# EAGLE board Shield_Eth05_p (EAGLE 5.10)
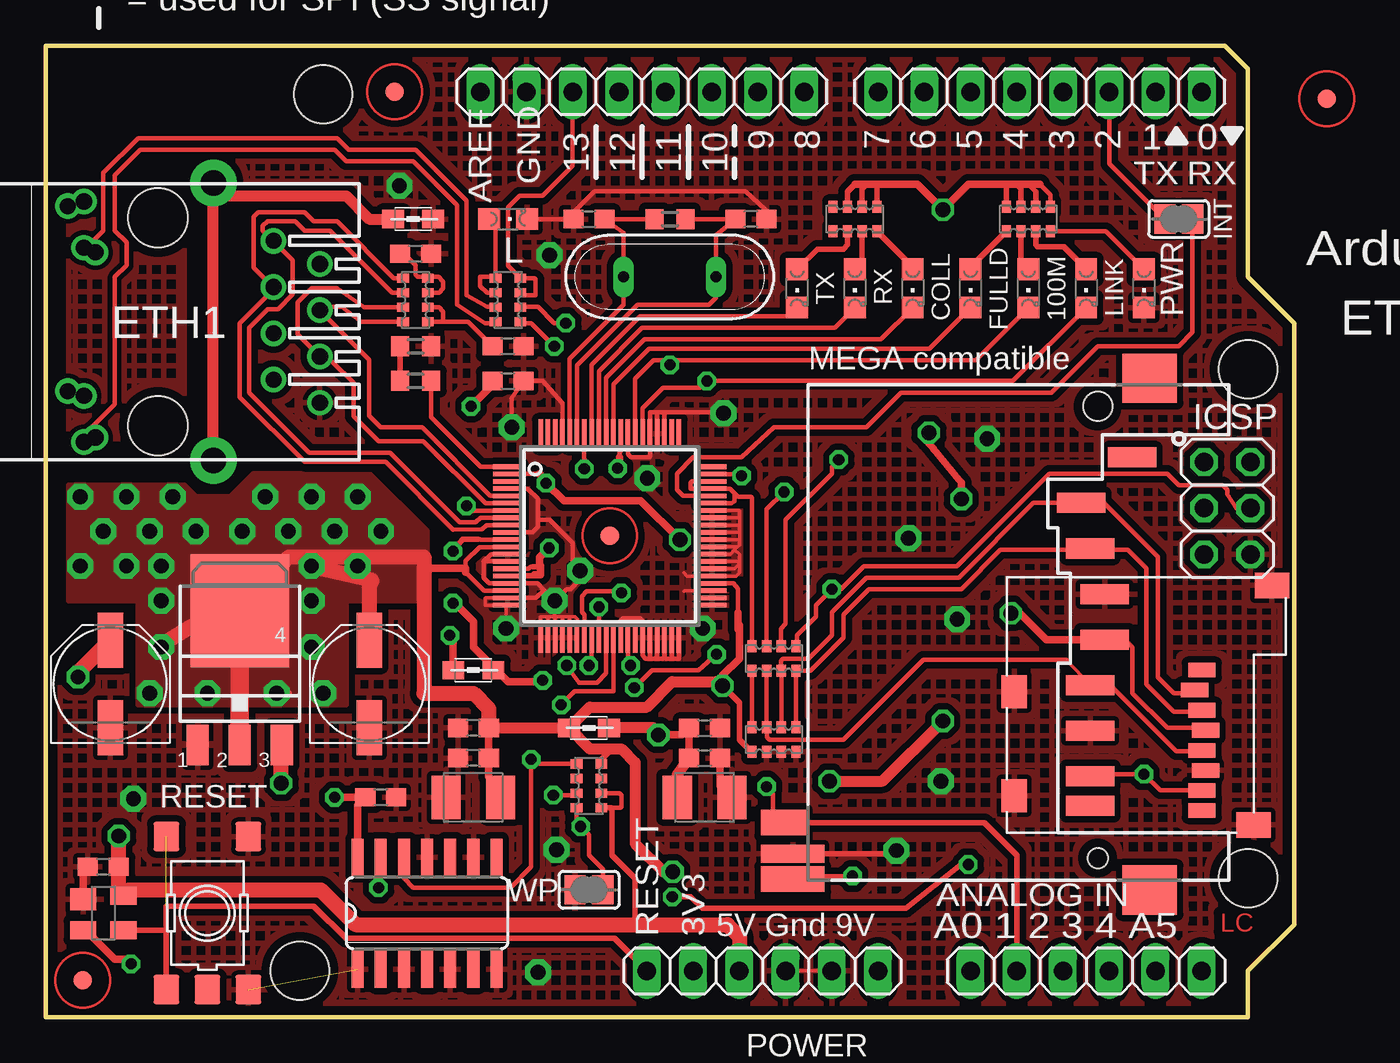
[diagram p0: board, top side]
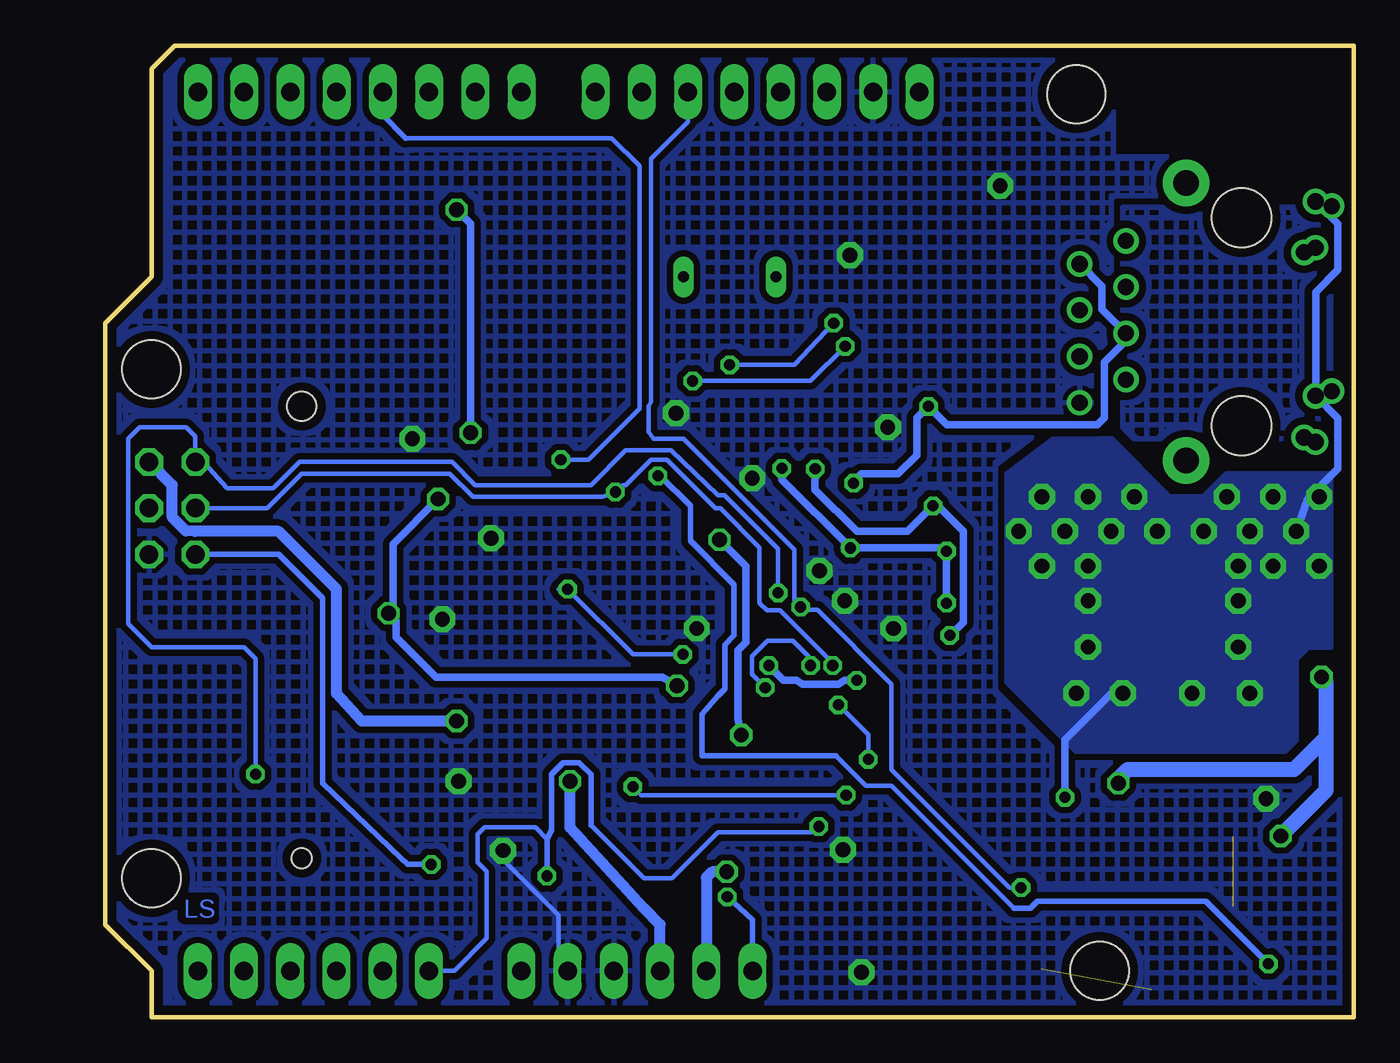
[diagram p1: board, bottom side, seen from below]

Size 68.58 x 53.34 mm. Coordinates in mm from the lower left corner, seen from the top.
Outline: 0,53.34 0,0 66.04,0 66.04,2.54 68.58,5.08 68.58,38.1 66.04,40.64 66.04,52.07 64.77,53.34 0,53.34
Copper layers (1*16): Top 0.035mm / dielectric 1.5mm / Bottom 0.035mm
Design rules "default *": minimum track width 2mil, minimum drill 2mil, track to track 2mil, track to pad 2mil, pad to pad 2mil, via to via 2mil, smd to smd 2mil, copper to edge 20mil, drill to drill 20mil, minimum pad ring 10mil, minimum via ring 8mil, stop-mask expansion 1mil, vias tented up to drill 2mil, thermal gap 10mil
Net classes: 0 default: width 0.152 mm, drill 0.61 mm, clearance 0.152 mm; 1 power: width 0.152 mm, drill 0.61 mm, clearance 0.152 mm; 2 VIN: width 0.61 mm, drill 0.813 mm; 3 usbvcc: width 0.508 mm, drill 0.711 mm, clearance 0.254 mm
Holes 3.2 mm at 66.04,35.56 66.04,7.62 15.24,50.67 13.97,2.54

## Footprints (pad centres in the part's own frame; a part is rotated, then mirrored left to right if it is on the bottom)
CHIPLED_0805 = smd 1.2 x 1.2: A 0,-1.05; C 0,1.05
PANASONIC_D = smd 3 x 1.4: + 2.4,0; - -2.4,0
C0603 = smd 1.1 x 1: 1 -0.85,0; 2 0.85,0
SMC_B = smd 1.6 x 2.4: + -1.5,0; - 1.5,0
SI40138 = drill 0.889 round: 1 -4.445,6.35; 2 -3.175,8.89; 3 -1.905,6.35; 4 -0.635,8.89; 5 0.635,6.35; 6 1.905,8.89; 7 3.175,6.35; 8 4.445,8.89; 9 -6.604,-4.064; 10 -4.064,-4.064; 11 4.064,-4.064; 12 6.604,-4.064; 13 -6.35,-4.953; 14 -3.81,-3.429; 15 3.81,-4.953; 16 6.35,-3.429 | drill 1.4 pad 2.54 round: S1 -7.62,3.048; S2 7.62,3.048 | hole 3.251: -5.715,0; 5.715,0
FIDUCIA-MOUNT = smd 1.016 x 1.016: P$1 0,0
DPACK = smd 1 x 1.6: 1 -2.28,-4.8; 3 2.28,-4.8 | smd 5.4 x 6.2: 2 0,2.5
SOT223 = smd 1.219 x 2.235: 1 -2.311,-3.099; 2 0,-3.099; 3 2.311,-3.099 | smd 3.6 x 2.2: 4 0,3.099
SO14 = smd 0.66 x 2.032: 1 -3.81,-3.073; 2 -2.54,-3.073; 3 -1.27,-3.073; 4 0,-3.073; 5 1.27,-3.073; 6 2.54,-3.073; 7 3.81,-3.073; 8 3.81,3.073; 9 2.54,3.073; 10 1.27,3.073; 11 0,3.073; 12 -1.27,3.073; 13 -2.54,3.073; 14 -3.81,3.073
SQFP-S-10X10-80 = smd 0.25 x 1.6: 1 -3.8,-5.6; 2 -3.4,-5.6; 3 -3,-5.6; 4 -2.6,-5.6; 5 -2.2,-5.6; 6 -1.8,-5.6; 7 -1.4,-5.6; 8 -1,-5.6; 9 -0.6,-5.6; 10 -0.2,-5.6; 11 0.2,-5.6; 12 0.6,-5.6; 13 1,-5.6; 14 1.4,-5.6; 15 1.8,-5.6; 16 2.2,-5.6; 17 2.6,-5.6; 18 3,-5.6; 19 3.4,-5.6; 20 3.8,-5.6; 41 3.8,5.6; 42 3.4,5.6; 43 3,5.6; 44 2.6,5.6; 45 2.2,5.6; 46 1.8,5.6; 47 1.4,5.6; 48 1,5.6; 49 0.6,5.6; 50 0.2,5.6; 51 -0.2,5.6; 52 -0.6,5.6; 53 -1,5.6; 54 -1.4,5.6; 55 -1.8,5.6; 56 -2.2,5.6; 57 -2.6,5.6; 58 -3,5.6; 59 -3.4,5.6; 60 -3.8,5.6 | smd 1.6 x 0.25: 21 5.6,-3.8; 22 5.6,-3.4; 23 5.6,-3; 24 5.6,-2.6; 25 5.6,-2.2; 26 5.6,-1.8; 27 5.6,-1.4; 28 5.6,-1; 29 5.6,-0.6; 30 5.6,-0.2; 31 5.6,0.2; 32 5.6,0.6; 33 5.6,1; 34 5.6,1.4; 35 5.6,1.8; 36 5.6,2.2; 37 5.6,2.6; 38 5.6,3; 39 5.6,3.4; 40 5.6,3.8; 61 -5.6,3.8; 62 -5.6,3.4; 63 -5.6,3; 64 -5.6,2.6; 65 -5.6,2.2; 66 -5.6,1.8; 67 -5.6,1.4; 68 -5.6,1; 69 -5.6,0.6; 70 -5.6,0.2; 71 -5.6,-0.2; 72 -5.6,-0.6; 73 -5.6,-1; 74 -5.6,-1.4; 75 -5.6,-1.8; 76 -5.6,-2.2; 77 -5.6,-2.6; 78 -5.6,-3; 79 -5.6,-3.4; 80 -5.6,-3.8
2X03 = drill 1.016 octagon: 1 -2.54,-1.27; 2 -2.54,1.27; 3 0,-1.27; 4 0,1.27; 5 2.54,-1.27; 6 2.54,1.27
SJ = smd 1.168 x 1.6: 1 -0.762,0; 2 0.762,0
1X08 = drill 1.016 long: 1 -8.89,0; 2 -6.35,0; 3 -3.81,0; 4 -1.27,0; 5 1.27,0; 6 3.81,0; 7 6.35,0; 8 8.89,0
1X06 = drill 1.016 long: 1 -6.35,0; 2 -3.81,0; 3 -1.27,0; 4 1.27,0; 5 3.81,0; 6 6.35,0
0805 = smd 1.2 x 1: 1 -1.1,0; 2 1.1,0
QS = drill 0.61 long: 1 -2.54,0; 2 2.54,0
R0603 = smd 1 x 1.1: 1 -0.85,0; 2 0.85,0
TS42 = smd 1.6 x 1.4: 1 -4.2,2.25; 2 4.2,2.25; 3 -4.2,-2.25; 4 4.2,-2.25; 5 -4.2,0
CAY16 = smd 0.5 x 0.65: 1 -1.2,-0.675; 2 -0.4,-0.675; 3 0.4,-0.675; 4 1.2,-0.675; 5 1.2,0.675; 6 0.4,0.675; 7 -0.4,0.675; 8 -1.2,0.675
SOT143 = smd 1.2 x 1.44: 1 -0.75,-1.1 | smd 1 x 1.44: 2 0.95,-1.1; 3 0.95,1.1; 4 -0.95,1.1
FPS009-3000 = smd 2.65 x 1.1: 1 -0.915,-5.3; 2 -0.415,-7.8; 3 0.385,-10.3; 4 0.385,-12.8; 5 -0.415,-15.3; 6 -0.415,-17.8; 7 -0.415,-20.3; 8 -0.415,-21.925; 9 1.885,-2.8 | smd 3.5 x 1: COM_TERM -16.75,-24.55 | smd 2.5 x 1.4: DETECT -17.25,-22.85 | smd 3 x 2.7: M1 2.85,1.55; M2 2.85,-26.55 | smd 3.5 x 1.4: WRITE_PROT -16.75,-25.95 | hole 1.6: 0,0 | hole 1.1: 0,-24.8
SDCARD-15TW-8821 = smd 0.8 x 1.5: 1 0,0; 2 1.1,-0.4; 3 2.2,0; 4 3.3,0.2; 5 4.4,0; 6 5.5,0.2; 7 6.6,0; 8 7.7,0 | smd 1.4 x 1.9: GND1 -4.66,3.85; GND2 8.49,2.85 | smd 1.8 x 1.4: GND3 1.19,-10.3; GND4 6.89,-10.3

## Placement (x,y rotation side)
100M  Yellow  [CHIPLED_0805]  53.98,40.01 180 top
C1  100u  [PANASONIC_D]  17.78,18.29 90 top
C2  100n  [C0603]  18.41,12.06 180 top
C3  100u  [PANASONIC_D]  3.56,18.29 90 top
C4  100n  [C0603]  25.4,34.92 0 top
C5  100n  [C0603]  20.32,41.91 180 top
C6  100n  [C0603]  3.17,8.26 180 top
C7  100n  [C0603]  25.4,36.83 180 top
C13  22p  [C0603]  38.73,43.81 180 top
C14  22p  [C0603]  29.84,43.81 0 top
C15  100n  [C0603]  36.2,14.22 0 top
C16  100n  [C0603]  36.2,15.88 0 top
C17  100n  [C0603]  23.5,14.22 180 top
C18  100n  [C0603]  23.5,15.88 180 top
C19  10u  [SMC_B]  23.5,12.06 180 top
C20  10u  [SMC_B]  36.2,12.06 0 top
COLL  Red  [CHIPLED_0805]  47.62,40.01 180 top
ETH1  SI-40138  [SI40138]  6.17,38.17 270 top
F1  FIDUCIALMOUNT  [FIDUCIA-MOUNT]  30.99,26.42 0 top
F2  FIDUCIALMOUNT  [FIDUCIA-MOUNT]  70.36,50.42 0 top
F3  FIDUCIALMOUNT  [FIDUCIA-MOUNT]  19.18,50.8 0 top
F4  FIDUCIALMOUNT  [FIDUCIA-MOUNT]  2.03,2.03 0 top
FULLD  Yellow  [CHIPLED_0805]  50.8,40.01 180 top
IC1  MC33269D-3.3  [DPACK]  10.67,19.81 0 top
IC2  MC33269ST-3.3T3  [SOT223]  10.67,18.03 0 top
IC3  74LVC14D  [SO14]  20.95,5.71 0 top
IC4  W5100  [SQFP-S-10X10-80]  30.99,26.42 270 top
ICSP  ICSP  [2X03]  64.9,27.94 270 top
INT  [SJ]  62.23,43.81 180 top
J1  [1X08]  32.77,50.8 180 top
J2  [1X06]  57.15,2.54 0 top
J3  [1X08]  54.61,50.8 180 top
L  Yellow  [CHIPLED_0805]  25.4,43.81 270 top
L1  BLM21PG300  [0805]  20.19,43.81 180 top
L2  BLM21PG300  [0805]  23.5,19.05 180 top
L3  BLM21PG300  [0805]  29.84,15.88 180 top
LINK  Yellow  [CHIPLED_0805]  57.15,40.01 180 top
POWER  [1X06]  39.37,2.54 0 top
PWR  Red  [CHIPLED_0805]  60.33,40.01 180 top
Q2  25MHz  [QS]  34.29,40.64 180 top
R9  300 1%  [R0603]  20.32,36.83 0 top
R10  12k 1%  [R0603]  20.32,34.92 180 top
R11  1M  [R0603]  34.29,43.81 180 top
RESET  TS42  [TS42]  8.89,5.71 90 top
RN1  49R9  [CAY16]  20.32,39.37 90 top
RN2  1K  [CAY16]  44.45,43.81 180 top
RN3  1K  [CAY16]  53.98,43.81 180 top
RN4  10K  [CAY16]  29.84,12.7 270 top
RN5  1k  [CAY16]  40.01,19.68 0 top
RN6  2k2  [CAY16]  40.01,15.24 0 top
RN7  1K  [CAY16]  25.4,39.37 90 top
RX  Green  [CHIPLED_0805]  44.45,40.01 180 top
TX  Green  [CHIPLED_0805]  41.27,40.01 180 top
U2  STM812  [SOT143]  3.17,5.71 270 top
WP  [SJ]  29.84,6.99 180 top
X1  FPS009-3001  [FPS009-3000]  57.78,33.53 0 top
X2  SDCARD-15TW-8821  [SDCARD-15TW-8821]  63.5,19.05 270 top

## Library data of the parts
100M COLL FULLD L LINK PWR RX TX = led
C1-C7 C13-C20 R9-R11 = rcl
ETH1 = ethernet
F1-F4 IC4 U2 = SmartPrj
IC1 IC2 = linear
IC3 = 74xx-eu
ICSP J1-J3 POWER = pinhead
INT WP = jumper
L1-L3 = wuerth-elektronik
Q2 = special
RESET = st-mod v1.4
RN1-RN7 = resistor-dil
X1 = con-yamaichi
X2 = st-mod v1.3

## Nets
5-GND: RESET.5
+1V8 [power]: IC4.11 IC4.15 IC4.16 IC4.33 IC4.69 L2.1
+1V8A [power]: IC4.7 IC4.74 L2.2
+3V3 [power]: C1.+ C2.2 C17.1 C18.1 C19.+ ETH1.9 ETH1.11 IC1.2 IC2.2 IC2.4 IC3.14 IC4.12 IC4.18 IC4.44 L3.2 POWER.2 RN2.1 RN2.2 RN2.3 RN3.1 RN3.2 RN3.3 RN3.4 RN4.8 RN6.1 X1.4 X2.4
+3V3A [power]: C4.1 C15.1 C16.1 C20.+ ETH1.2 ETH1.5 IC4.2 L3.1
+5V [power]: C3.+ C6.1 IC1.3 IC2.3 ICSP.2 POWER.3 RN4.5 RN4.6 U2.4
AREF: J1.8
DETECT: J2.2 RN4.3 X1.DETECT
FDXLED: FULLD.C IC4.70
GND [power]: C1.- C2.1 C3.- C4.2 C5.1 C6.2 C7.1 C13.1 C14.1 C15.2 C16.2 C17.2 C18.2 C19.- C20.- ETH1.8 IC1.1 IC2.1 IC3.1 IC3.3 IC3.5 IC3.7 IC3.9 IC3.11 IC4.4 IC4.10 IC4.13 IC4.14 IC4.17 IC4.19 IC4.20 IC4.21 IC4.22 IC4.23 IC4.24 IC4.25 IC4.26 IC4.32 IC4.34 IC4.35 IC4.36 IC4.37 IC4.38 IC4.39 IC4.40 IC4.41 IC4.42 IC4.43 IC4.45 IC4.46 IC4.47 IC4.48 IC4.49 IC4.50 IC4.51 IC4.52 IC4.53 IC4.54 IC4.63 IC4.64 IC4.65 IC4.68 IC4.77 ICSP.6 J1.7 L1.1 L.C POWER.4 POWER.5 PWR.C R9.2 RESET.3 RESET.4 RN6.2 RN6.3 RN6.4 U2.1 WP.2 X1.3 X1.6 X1.COM_TERM X2.6 X2.GND1 X2.GND2 X2.GND3 X2.GND4
INT: IC4.56 INT.1
LINKLED: IC4.66 LINK.C RN7.1
MISO: IC4.27 ICSP.1 X1.7 X2.7
MOSI: IC4.28 ICSP.4 RN5.5
MOSI3: RN5.4 RN6.5 X1.2 X2.3
N$1: PWR.A RN3.8
N$2: L.A RN7.5 RN7.6
N$3: C5.2 RN1.3 RN1.4
N$4: IC4.55 IC4.57 IC4.58 RN5.8
N$6: IC4.73 TX.C
N$7: IC4.72 RX.C
N$8: COLL.C IC4.71
N$9: RN2.6 TX.A
N$10: RN5.1 RN6.8
N$13: ETH1.10 RN7.7
N$14: ETH1.12 RN7.8
N$22: RN2.7 RX.A
N$23: COLL.A RN2.8
N$24: FULLD.A RN3.5
N$25: 100M.A RN3.6
N$26: LINK.A RN3.7
N$29: C7.2 RN1.1 RN1.2
N$30: R9.1 R10.2
N$31: IC4.1 R10.1
OSC1E: C14.2 IC4.76 Q2.2 R11.2
OSC2E: C13.2 IC4.75 Q2.1 R11.1
PD2: INT.2 J3.3
PIN13: J1.6 RN7.3 RN7.4
RESET: ICSP.5 POWER.1 RESET.1 RESET.2 U2.3
RESET_W: IC4.59 U2.2
RXIN: ETH1.6 IC4.6 RN1.7
RXIP: ETH1.4 IC4.5 RN1.8
SCK: IC4.30 ICSP.3 RN5.7
SCK3: RN5.2 RN6.7 X1.5 X2.5
SD_CS: J3.5 RN5.6
SEN: IC3.12 IC4.31 RN4.1
SEN3: RN5.3 RN6.6 X1.1 X2.2
SH: ETH1.S1 ETH1.S2 L1.2
SPD: 100M.C IC4.67 RN7.2
SS [power]: IC3.13 IC4.29 J1.3
TXON: ETH1.3 IC4.9 RN1.5
TXOP: ETH1.1 IC4.8 RN1.6
WP: J2.1 RN4.4 WP.1 X1.WRITE_PROT

## Tracks (layer width: path | path; a pad name or v marks a point on that pad's centre or on a via)
+1V8  (via drill 0.61)
  Top 0.203: v31.42,30.12 31.52,30.14
  Top 0.254: 26.44,24.24 26.3,24.24 26.29,24.23 IC4.16 | 23.75,26.24 23.86,26.24 23.89,26.21 IC4.11 | v32.13,19.3 31.99,19.43 31.99,20.04 IC4.33 | 26.77,24.74 26.64,24.74 26.52,24.61 26.19,24.61 IC4.15 | 31.52,30.73 31.52,30.95 31.59,31.07 IC4.69
  Top 0.305: 26.85,24.28 26.72,24.24 26.44,24.24 | 23.75,26.24 22.91,26.24 v22.38,25.58 | 26.77,24.74 26.95,24.74 27.14,24.83 27.18,24.79
  Top 0.406: 31.52,30.14 31.52,30.73 | 26.85,24.28 27.18,24.28 27.18,24.79 | 27.3,18.41 v27.3,18.49 27.23,18.41 25.4,18.41 24.64,19.18 L2.1 24.34,19.47 23.5,20.32 23.5,21.72 22.48,22.73 v22.38,22.73 | 27.14,24.83 27.14,25.23 v27.66,25.76
  Bottom 0.406: v22.38,22.73 v22.38,25.58 22.3,25.76 v27.66,25.76 | v32.13,19.3 31.32,18.49 30.61,18.49 30.28,18.29 28.32,18.29 27.99,18.49 v27.3,18.49 | v27.66,25.76 28.02,25.76 | v31.42,30.12 31.42,29.52 v27.66,25.76
  pour Bottom (isolate 0.406, hatched): 1.27,31.75 12.06,31.75 12.7,32.38 12.7,44.45 1.27,44.45
+1V8A  (via drill 0.61)
  Top 0.203: 24.61,27.81 IC4.7
  Top 0.254: 23.39,27.81 24.61,27.81 | IC4.74 29.59,30.48
  Top 0.305: v23.11,28.07 23.39,27.81
  Top 0.406: v29.59,30.1 29.59,30.48 | L2.2 22.39,20.76 v22.2,20.95
  Bottom 0.406: v22.2,20.95 21.46,21.69 21.46,26.67 22.86,28.07 v23.11,28.07 24.51,26.67 27.3,26.67 29.59,28.96 v29.59,30.1
+3V3  (via drill 0.61, 0.81, 0.81 pad 1.42)
  Top 0.203: 24.66,25.81 IC4.12 | IC2.4 | IC2.4 IC1.2 | 58.88,20.73 X1.4
  Top 0.254: 23.06,24.43 24.08,23.42 24.61,23.42 IC4.18 | 23.06,24.64 23.06,25.04 23.82,25.81 24.66,25.81 | 38.02,22.2 38.02,23.52 37.8,23.81 37.41,23.81 IC4.44 | 38.77,14.56 RN6.1 | 59.28,20.73 59.69,20.32 59.69,17.78 61.59,15.88 64.21,15.88 X2.4 | 53.98,45.72 54.38,45.32 | RN3.1 55.17,45.16 54.61,45.72
  Top 0.305: RN2.3 44.05,45.32 44.45,45.72 | RN2.2 44.85,45.48 45.09,45.72 | RN2.1 45.65,45.65 45.72,45.72 | 54.38,45.32 RN3.2 | RN3.3 53.58,45.48 53.34,45.72 | RN3.4 52.77,45.65 52.7,45.72 | RN4.8 30.52,14.14 31.11,14.73 | 38.77,14.56 38.1,15.24 38.1,17.27 v37.19,18.19
  Top 0.406: 23.06,24.43 23.06,24.64 21.21,24.64 20.7,24.89 20.78,25.27 | 59.28,20.73 58.88,20.73 54.97,20.73 53.52,22.17 v53.01,22.17 | 48.51,32.13 v48.51,32.08 48.51,31.5 48.77,31.21 50.29,29.34 v50.29,28.45 | 38.02,21.59 38.02,21.29 | 38.02,21.59 38.02,22.2 | 44.45,45.72 45.09,45.72 45.72,45.72 47.88,45.72 v49.28,44.32 50.67,45.72 52.7,45.72 53.34,45.72 53.98,45.72 54.61,45.72 | v37.19,18.19 37.19,18.77 38.1,19.68 38.1,21.51 38.02,21.59 | C18.1 C17.1 24.34,13.19 24.82,12.71 | IC3.14 17.14,11.64 C2.2 v15.88,12.06 | v12.7,17.78 13.34,17.78 | IC2.2 10.79,14.81
  Top 0.61: C19.+ 24.82,12.71 24.77,12.93 | L3.2 29.89,14.73 31.11,14.73 31.62,14.73 32.38,13.97 32.38,9.53 33.93,7.98 v34.44,7.98 | v37.19,18.19 37.24,18.19 36.83,18.41 34.42,18.41 33.02,17.02 29.89,17.02 L3.2 | C18.1 L3.2
  Top 0.813: 6.73,20.68 7.98,21.44 IC1.2 13.36,25.27 20.78,25.27 20.78,17.78 23.5,17.78 24.34,16.93 C18.1 | C1.+ 17.78,23.75 17.91,23.88 17.91,24 v14.61,24.77
  Top 1.016: IC2.2 IC2.4
  Bottom 0.406: v50.29,28.45 52.78,25.96 52.78,22.66 v53.01,22.17 52.6,21.77 52.6,20.85 50.42,18.67 37.97,18.67 v37.19,18.19 | v48.51,32.08 48.51,43.56 v49.28,44.32 | v3.17,26.67 2.54,28.45 0.89,30.1 0.89,32.89 ETH1.11 2.11,39.8 0.89,41.02 0.89,43.56 ETH1.9 | v15.88,12.06 15.88,15.24 13.34,17.78 v12.7,17.78
  Bottom 0.61: v34.44,7.98 35.26,7.98 35.56,7.67 POWER.2
  other vias: 14.61,28.57 15.88,26.67 14.61,20.32 6.35,20.32 6.35,22.86 6.35,24.77 8.26,26.67 13.34,26.67 4.45,24.77 8.89,17.78 14.61,22.86 10.79,26.67 17.14,24.77 5.71,26.67 18.41,26.67 17.14,28.57 12.06,28.57 6.99,28.57 4.45,28.57 1.91,28.57 1.91,24.77 5.71,17.78 15.24,17.78
  pour Top (isolate 0.406, no thermals): 5.08,17.14 16.51,17.14 16.51,22.86 20.95,22.86 20.95,26.67 17.78,29.84 11.43,29.84 10.16,28.57 8.26,28.57 7.62,29.21 1.27,29.21 1.27,22.86 5.08,22.86
  pour Bottom (isolate 0.406, no thermals): 3.17,15.24 3.81,14.61 15.24,14.61 19.05,18.41 19.05,29.84 16.51,31.75 13.34,31.75 10.16,28.57 8.26,28.57 6.99,29.84 1.27,29.84 1.27,20.32 2.54,20.32 3.17,19.68
+3V3A  (via drill 0.61, 0.81)
  Top 0.254: v27.48,29.31 27.18,29.72 27.18,29.82 26.2,29.82 IC4.2
  Top 0.406: v34.85,26.21 32.69,28.35 28.47,28.35 v27.48,29.31 27.13,29.82 27.18,29.77 | 24.64,35.18 C4.1 24.55,34.71 v23.37,33.53 | C15.1 C16.1 34.96,15.49 v33.66,15.49
  Top 0.61: C20.+ 34.7,13.32 C15.1 | L3.1 33.4,15.88 v33.66,15.49
  Bottom 0.406: v33.66,15.49 33.83,16.36 33.83,20.14 33.4,20.57 33.4,24.77 v34.85,26.21 | ETH1.5 | ETH1.2 13.84,40.13 13.84,38.86 ETH1.5 | v27.48,29.31 27.48,29.41 27.05,29.84 25.04,29.82 24,30.86 24,32.89 v23.37,33.53 22.35,32.51 14.1,32.51 13.72,32.89 13.72,35.94 12.52,37.13 ETH1.5
+5V  (via drill 0.81, 0.81 pad 1.02)
  Top 0.203: IC1.3 IC2.3
  Top 0.254: RN4.6 31.52,12.3 31.62,12.19 31.62,11.56 31.57,11.5 RN4.5
  Top 0.305: RN4.5 31.05,11.5 31.11,11.43 31.11,8.89 32.38,7.62 32.38,5.08
  Top 0.406: IC1.3 13.11,15.01 | U2.4 4.03,6.92
  Top 0.61: v43.05,12.95 45.97,12.95 v49.28,16.26
  Top 0.813: v1.78,18.67 1.78,18.91 C3.+ | v12.95,12.83 IC1.3 | POWER.3 38.1,4.45 37.47,5.08 32.38,5.08 17.02,5.08 15.11,6.99 4.59,6.99 U2.4 | v4.03,9.95 C6.1 4.03,6.92
  Bottom 0.61: ICSP.2 64.9,29.21 64.9,27.43 64.16,26.7 63.65,26.67 59.05,26.67 55.88,23.5 55.88,17.78 54.48,16.26 v49.28,16.26 49.15,16.26 | v43.05,12.95 43.05,10.41 38.99,5.97 38.1,5.08 POWER.3
  Bottom 0.813: v1.78,18.67 1.52,18.41 1.52,15.37 | v12.95,12.82 v12.95,12.83 v12.94,12.83 12.94,13.09 12.45,13.59 3.3,13.59 1.52,15.37 | v4.03,9.95 1.52,12.45 1.52,15.37
DETECT  (via drill 0.61)
  Top 0.254: v39.6,12.65 39.95,12.27 39.95,11.35 X1.DETECT | v27.89,12.19 29.06,12.19 RN4.3
  Top 0.305: X1.DETECT 51.55,10.68 53.34,8.89 J2.2
  Bottom 0.203: 39.17,12.19 v39.6,12.65
  Bottom 0.254: v27.89,12.19 39.17,12.19
FDXLED
  Top 0.254: IC4.70 31.19,34.74 33.15,36.7 48.55,36.7 FULLD.C
GND  (via drill 0.81 pad 1.42)  (1 unrouted)
  Top 0.203: 33.17,19.68 IC4.36 | 24.38,23.81 24.36,23.82 | 33.6,33.2 IC4.64 | C14.1 28.8,43.99 | POWER.4 POWER.5 | 40.64,8.97 41.96,8.97 X1.COM_TERM 39.93,8.99 | IC1.1 IC2.1 | IC4.21 27.19,21.96 27.19,21.97 27.56,21.97 | 28.07,21.97 27.56,21.97 | 28.07,21.97 28.45,21.97 | 28.45,21.97 28.7,21.97 | 28.7,21.97 29.08,21.97 29.21,21.84 29.21,20.84 IC4.26 | IC4.25 28.79,21.89 28.7,21.97 | IC4.24 28.39,21.91 28.45,21.97 | IC4.23 27.99,21.89 28.07,21.97 | IC4.22 27.59,21.94 27.56,21.97 | IC4.54 38.1,27.82 38.1,27.81 38.1,27.3 | 38.1,26.92 38.1,27.3 | 38.1,26.67 38.1,26.92 | 38.1,26.29 38.1,26.67 | 38.1,26.29 38.1,25.91 38.01,25.82 | IC4.48 37.61,25.42 37.85,25.65 | 37.85,25.65 38.01,25.82 | 38.01,25.82 IC4.49 | IC4.50 38.03,26.22 38.1,26.29 | IC4.51 38.05,26.62 38.1,26.67 | IC4.52 38.01,27.02 38.1,26.92 | IC4.53 37.99,27.42 38.1,27.3 | 28.07,21.97 27.96,22.07 v27.96,22.86 | IC4.19 24.16,23.02 24.13,22.99 24.13,22.61 24.14,22.62 IC4.20 25.3,22.53 v25.3,21.34 | 38.1,24.89 38.1,24.38 37.93,24.22 IC4.45 35.22,24.22 35.05,24.38 | 38.1,24.89 38.1,25.4 37.85,25.65 | IC4.47 37.98,25.02 38.1,24.89 | IC4.46 37.82,24.62 38.1,24.89 | IC4.43 35.1,23.42 35.05,23.37
  Top 0.254: 32.4,21.89 31.73,21.89 31.59,21.75 31.59,21.61 IC4.32 | 32.4,21.89 IC4.34 | 32.4,21.89 32.66,21.89 32.79,21.77 IC4.35 32.78,19.86 32.95,19.68 33.17,19.68 33.2,19.68 | IC4.37 33.59,19.81 33.48,19.68 | 33.2,19.68 33.48,19.68 | IC4.36 33.2,19.68 | 24.36,23.82 24.07,24.12 24.07,25.02 | 24.07,25.02 24.61,25.02 IC4.14 | 24.38,23.81 IC4.17 27.01,23.82 27.38,23.44 | 33.6,33.2 33.19,33.2 IC4.65 33.19,30.77 33.15,30.73 32.16,30.73 31.99,30.9 IC4.68 | 33.98,33.2 33.59,33.21 IC4.64 | 33.98,33.2 IC4.63 | L.C C14.1 | 28.8,43.99 30.15,45.34 38.43,45.34 39.9,43.99 C13.1 | 33.98,33.2 37.31,33.2 v37.24,33.15 | 27.38,23.44 v27.96,22.86 28.6,23.5 28.83,23.5 29.36,24.03 v29.36,24.51 28.96,24.92 28.96,26.04 27.69,27.3 27.05,27.3 | IC4.19 26.95,23.02 27.38,23.44 | IC4.4 26.48,29.02 27.05,28.45 27.05,27.3 | IC4.10 26.74,26.62 27.05,26.92 27.05,27.3 | IC4.13 24.46,25.42 24.07,25.02 | IC4.77 28.39,33.72 27.3,34.92 C4.2 25.6,33.98 v25.6,32.38 | IC4.40 34.79,19.7 34.8,19.68 34.42,19.68 | IC4.39 34.42,20.79 34.42,19.68 | 33.99,19.76 33.99,19.73 34.04,19.68 34.42,19.68 | 33.99,19.76 IC4.38 | 33.99,19.76 33.91,19.68 33.48,19.68
  Top 0.305: 41.96,8.97 46.56,8.97 v46.74,9.14
  Top 0.406: U2.1 2.08,8.01 C6.2 | C20.- 37.05,12.71 C15.2
  Bottom 0.254: v46.74,9.14 46.74,8.64 43.69,5.59 43.69,3.05 POWER.5
  other vias: 27.69,41.83 49.17,12.95 51.71,31.75 47.4,26.29 50.06,21.84 36.09,21.34 33.05,29.59 19.43,45.64 27.05,2.46 4.83,11.99 28.07,9.19
  pour Top (isolate 0.254, rank 2, hatched): 1.27,31.75 7.62,31.75 7.62,44.45 1.27,44.45
  pour Top (isolate 0.356, rank 2, hatched): 0.51,47.24 13.21,47.24 13.21,52.83 64.52,52.83 65.53,51.82 65.53,40.13 68.07,37.59 68.07,5.59 65.53,3.05 65.53,0.51 0.51,0.51
  pour Bottom (isolate 0.356, rank 2, hatched): 0.51,47.24 13.21,47.24 13.21,52.83 64.52,52.83 65.53,51.82 65.53,40.13 68.07,37.59 68.07,5.59 65.53,3.05 65.53,0.51 0.51,0.51
INT
  Top 0.254: IC4.56 35.01,28.62 34.67,28.96 34.67,29.84 35.56,30.73 38.23,30.73 40.01,32.38 45.09,32.38 46.99,34.29 55.24,34.29 57.78,36.83 62.23,36.83 62.99,37.59 INT.1
LINKLED  (via drill 0.61)
  Top 0.254: IC4.66 32.79,33.42 33.91,34.54 35.94,34.54 v36.32,34.92 | v36.32,34.92 36.2,34.92 | v27.94,36.83 26.67,38.1 26.14,38.1 RN7.1 | v36.32,34.92 53.12,34.92 LINK.C
  Bottom 0.254: v36.32,34.92 29.84,34.92 v27.94,36.83
MISO  (via drill 0.61)
  Top 0.203: IC4.27 29.59,21.61
  Top 0.254: 29.59,21.61 29.59,22.1 29.46,22.23 29.46,23.11 29.72,23.37 31.37,23.37 v31.62,23.29 | X1.7 57.48,13.34 v60.33,13.34 61.21,12.45 X2.7
  Bottom 0.254: v31.62,23.29 31.62,25.7 34.57,28.65 34.92,28.65 37.52,31.11 40.01,31.11 41.91,29.21 48.26,29.21 49.53,30.48 57.91,30.48 59.36,29.03 61.87,29.03 62.89,30.15 ICSP.1 63.63,31.88 64.14,32.38 66.67,32.38 67.31,31.75 67.31,21.59 66.04,20.32 60.96,20.32 60.33,19.68 v60.33,13.34
MOSI  (via drill 0.61)
  Top 0.254: v29.84,19.3 29.98,19.32 29.98,20.04 IC4.28 | v32.33,18.09 33.3,19.05 35.87,19.05 v36.85,19.91 | ICSP.4 65.41,27.94 64.9,28.7 64.9,28.96 64.64,29.21 62.23,29.21 61.59,29.84 55.12,29.84 50.04,24.77 44.96,24.77 43.69,23.5 v43.18,23.5 42.31,22.62 42.31,21.99 41.27,20.95 41.27,20.43 RN5.5
  Bottom 0.254: v29.84,19.3 29.97,19.81 30.82,20.66 32.22,20.66 33.07,19.81 33.07,18.82 v32.33,18.09 | 43.69,23.5 v43.18,23.5 39.6,19.91 v36.85,19.91
MOSI3
  Top 0.203: 57.93,25.65 X1.2
  Top 0.254: RN6.5 RN5.4 42,19.01 43.81,20.83 43.81,22.1 45.21,23.5 50.29,23.5 52.45,25.65 57.93,25.65 59.44,25.65 60.45,24.64 60.45,18.29 61.98,16.76 63.41,16.76 X2.3
N$1
  Top 0.254: RN3.8 58.24,43.14 PWR.A
N$2
  Top 0.254: L.A 24.73,43.44 RN7.5 24.66,40.64 23.88,40.64 23.88,40.13 24.24,39.77 RN7.6
N$3
  Top 0.254: RN1.3 21.61,39.77 21.84,40.01 21.84,40.39 21.59,40.64 21.07,40.64 RN1.4 20.93,40.64 20.45,40.64 20.32,40.77 20.32,41.27 19.68,41.91 C5.2
N$4
  Top 0.254: IC4.58 35.51,29.42 35.43,29.34 35.43,29.02 IC4.57 36.65,29.02 37.59,29.02 37.85,28.77 | IC4.55 36.6,28.21 37.66,28.21 37.85,28.33 37.85,28.77 | 37.85,28.77 38.04,28.57 38.73,28.57 38.8,28.5 RN5.8
N$6
  Top 0.254: IC4.73 29.98,35.83 32.64,38.48 40.8,38.48 TX.C
N$7
  Top 0.254: IC4.72 30.39,35.47 32.77,37.85 43.34,37.85 RX.C
N$8
  Top 0.254: IC4.71 30.79,35.11 32.89,37.21 45.88,37.21 COLL.C
N$9
  Top 0.305: RN2.6 44.05,42.4 43.81,42.16 42.38,42.16 TX.A
N$10
  Top 0.254: RN6.8 RN5.1
N$13
  Top 0.254: ETH1.10 2.23,42.24 3.17,43.18 3.17,46.35 5.08,48.26 16,48.26 16.64,47.62 20.32,47.62 23.11,44.83 23.11,39.62 24.26,38.99 24.71,38.99 RN7.7
N$14
  Top 0.254: ETH1.12 2.11,31.95 3.81,33.66 3.81,40.64 4.45,41.27 4.45,42.55 3.81,43.18 3.81,46.23 5.21,47.62 15.88,47.62 16.51,46.99 20.19,46.99 22.61,44.58 22.61,39.12 24.13,38.1 24.66,38.1 RN7.8
N$22
  Top 0.305: RN2.7 44.85,41.45 RX.A
N$23
  Top 0.305: COLL.A 47.62,41.16 RN2.8
N$24
  Top 0.305: FULLD.A 50.8,41.16 RN3.5
N$25
  Top 0.305: RN3.6 53.58,41.45 100M.A
N$26
  Top 0.305: RN3.7 54.38,42.4 54.48,42.29 55.91,42.29 LINK.A
N$29
  Top 0.254: RN1.1 21.84,38.17 | 21.84,38.17 23.21,38.17 C7.2 | RN1.2 21.61,38.97 21.84,38.73 21.84,38.17
N$30
  Top 0.305: R10.2 R9.1
N$31
  Top 0.254: IC4.1 24.43,30.21 23.89,30.21 21.17,32.93 R10.1
OSC1E
  Top 0.254: IC4.76 28.79,36.15 31.75,39.12 Q2.2 31.75,43.05 C14.2 R11.2
OSC2E
  Top 0.254: IC4.75 29.19,35.79 32.51,39.12 36.45,39.12 36.83,39.5 Q2.1 36.83,42.93 C13.2 R11.1
PD2
  Top 0.254: J3.3 58.42,46.86 INT.2
PIN13
  Top 0.254: J1.6 28.96,46.74 27.3,45.09 26.04,45.09 25.4,44.45 25.4,41.24 RN7.4 26.85,40.57 26.92,40.51 26.92,39.62 26.22,39.62 RN7.3
RESET  (via drill 0.61 pad 1.02)  (1 unrouted)
  Top 0.305: v50.67,8.38 50.29,8.38 47.24,5.97 36.07,5.97 35.43,6.6 v34.42,6.6 | POWER.1 31.24,4.32 16.51,4.32 14.73,6.1 6.64,6.1 6.64,4.76 | RESET.1 6.64,4.76 | 6.64,4.76 U2.3
  Bottom 0.305: ICSP.5 59.05,25.4 56.64,22.99 56.64,12.83 52.35,8.76 51.97,8.38 v50.67,8.38 | POWER.1 33.02,5.33 v34.42,6.6
RESET_W  (via drill 0.61 pad 1.02)
  Top 0.254: IC4.59 38.2,29.82 v38.23,29.72
  Top 0.406: U2.2 2.22,4.76 3.81,3.17 4.45,3.17 v4.7,2.92
  Bottom 0.254: 18.67,5.97 25.4,12.7 26.8,12.7 28.45,14.35
  Bottom 0.305: v38.23,29.72 38.1,29.72 36.45,28.07 36.45,26.16 34.04,23.75 34.04,20.95 34.54,20.45 34.54,18.03 34.92,17.65 35.81,16.64 35.81,14.35 28.45,14.35 | 18.67,5.97 17.78,5.97 17.4,6.35 8.13,6.35 v4.7,2.92
RXIN
  Top 0.254: IC4.6 24.61,28.22 24.16,28.22 20.73,31.62 18.29,31.62 16.92,32.99 16.92,34.82 15.75,35.99 ETH1.6 13.84,37.49 13.84,39.24 14.61,40.01 16,40.01 17.51,38.97 RN1.7
RXIP
  Top 0.254: IC4.5 24.42,28.62 20.7,32.35 20.66,32.38 18.41,32.38 17.78,33.02 17.78,36.09 ETH1.4 15.24,38.99 16.26,38.99 17.34,38.17 RN1.8
SCK  (via drill 0.61)
  Top 0.203: 30.79,20.04 IC4.30
  Top 0.254: 30.79,20.04 30.79,18.87 30.28,18.36 29.31,18.36 v28.63,19.3 | RN5.7 39.6,27.87 v40.56,28.83
  Bottom 0.254: v28.63,19.3 28.98,19.79 31.52,22.33 32.23,22.33 32.64,22.73 32.64,25.78 34.8,27.94 35.05,27.94 37.72,30.61 38.61,30.61 40.01,29.21 40.18,29.21 v40.56,28.83 41.27,28.57 48.39,28.57 49.66,29.84 57.78,29.84 59.69,27.94 ICSP.3
SCK3
  Top 0.203: 56.06,19.63 X1.5
  Top 0.254: RN5.2 RN6.7 39.62,15.9 39.62,15.37 39.75,15.24 43.81,15.24 48.21,19.63 56.06,19.63 | X1.5 58.48,18.23 62.1,14.61 64.09,14.61 X2.5
SD_CS  (via drill 0.61 pad 1.02)
  Top 0.254: RN5.6 40.39,20.38 40.39,21.34 40.64,21.59 40.64,27.3 43.18,29.84 43.18,30.23 v43.56,30.61
  Bottom 0.254: v43.56,30.61 42.04,30.61 39.24,33.4 39.24,46.74 40.77,48.26 52.07,48.26
  Bottom 0.305: J3.5 53.34,49.53 52.07,48.26
SEN  (via drill 0.61)
  Top 0.203: 31.19,20.04 IC4.31
  Top 0.254: 31.19,20.04 31.19,17.88 29.06,17.88 v28.32,17.14 | 19.76,9.35 IC3.12 19.68,7.62 20.19,7.11 25.53,7.11 26.67,8.26 v26.67,14.15 26.68,13.9 RN4.1
  Bottom 0.254: v26.67,14.15 26.67,15.49 v28.32,17.14
SEN3
  Top 0.254: RN6.6 RN5.3 40.39,19.03 40.39,19.56 40.51,19.68 41.91,19.68 43.18,20.95 43.18,22.23 45.09,24.13 50.16,24.13 54.26,28.23 X1.1 58.13,28.23 61.09,25.27 61.09,18.67 61.98,17.78 62.93,17.78 X2.2
SH
  Top 0.61: L1.2 17.78,43.81 16.51,45.09 9.93,45.09 ETH1.S1 ETH1.S2
SPD  (via drill 0.61)
  Top 0.254: IC4.67 32.39,35.05 33.4,36.07 34.29,36.07 | 34.29,36.07 51.09,36.07 100M.C | v28.57,38.1 27.94,38.1 27.05,38.99 26.06,38.99 RN7.2 | 34.29,36.07 v34.29,35.81
  Bottom 0.254: v34.29,35.81 30.73,35.81 v28.57,38.1
SS  (via drill 0.61 pad 1.02)
  Top 0.254: v30.39,22.51 IC4.29 | IC3.13 18.41,7.24 v18.29,7.11
  Bottom 0.254: v18.29,7.11 18.92,7.11 25.4,13.59 25.4,18.29 29.46,22.35 30.23,22.35 v30.39,22.51 30.73,22.86 30.73,25.65 36.83,31.75 38.48,31.75 38.73,32.13 38.73,33.53 38.61,33.78 38.61,47.12 36.58,49.15 J1.3
TXON
  Top 0.254: IC4.9 24.22,27.02 23.98,26.77 22.39,26.76 18.67,30.48 14.22,30.48 10.67,34.04 10.67,38.1 12.65,40.08 | 12.65,40.08 12.7,40.13 | 12.65,40.08 ETH1.3 12.5,40.08 11.43,41.15 11.43,43.94 11.68,44.2 14.22,44.2 14.73,43.69 16,43.69 19.12,40.57 RN1.5
TXOP
  Top 0.254: IC4.8 24.02,27.42 23.89,27.41 23.62,27.18 22.73,27.18 18.92,30.99 14.48,30.99 11.18,34.29 11.18,37.85 12.19,38.86 12.78,38.86 13.56,39.67 13.56,41.55 12.52,42.59 ETH1.1 12.5,42.62 11.94,43.18 11.94,43.43 12.19,43.69 13.72,43.69 14.22,43.18 15.62,43.18 19.03,39.77 RN1.6
WP  (via drill 0.61, 0.61 pad 1.02)
  Top 0.254: v44.32,7.75 41.84,7.75 X1.WRITE_PROT | RN4.4 29.17,10.68 v29.39,10.46 29.84,10.01 29.84,8.89 30.61,8.13 WP.1
  Bottom 0.254: J2.1 49.4,2.54 47.62,4.32 47.62,8 48.13,8.51 48.13,10.03 47.75,10.41 44.96,10.41 44.32,9.78 | 41.91,10.54 38.99,7.62 37.47,7.62 34.92,10.16 29.69,10.16 v29.39,10.46
  Bottom 0.305: 41.91,10.54 41.91,13.34 42.55,13.97 43.43,13.97 44.07,13.34 44.07,10.29 44.32,9.78 v44.32,7.75 | v29.39,10.46 29.44,10.41

## Text on the board
Top: LC
Bottom: LS
tPlace: = used for SPI - Available in MEGA | = used for SPI (SS signal) | 9 | 8 | 7 | 6 | 5 | 4 | 3 | 2 | 1 | 0 | 13 | 12 | 11 | 10 | TM | ETH | Shield | SD | V5 | MEGA compatible
tNames: TX | RX | GND | AREF | Arduino | ANALOG IN | RESET | 3V3 | 5V Gnd 9V | A0 1 2 3 4 A5 | Copyright (c) 2010 Arduino | Released under the Creative Commons Attribution-Share Alike 3.0 License | http://creativecommons.org/licenses/by-sa/3.0/
Reference: C14 | R11 | C13 | C5 | Q2 | R10 | C7 | R9 | C4 | IC1 | C1 | C3 | C18 | C16 | C17 | C15